# EAGLE board untitled (EAGLE 9.6.2)
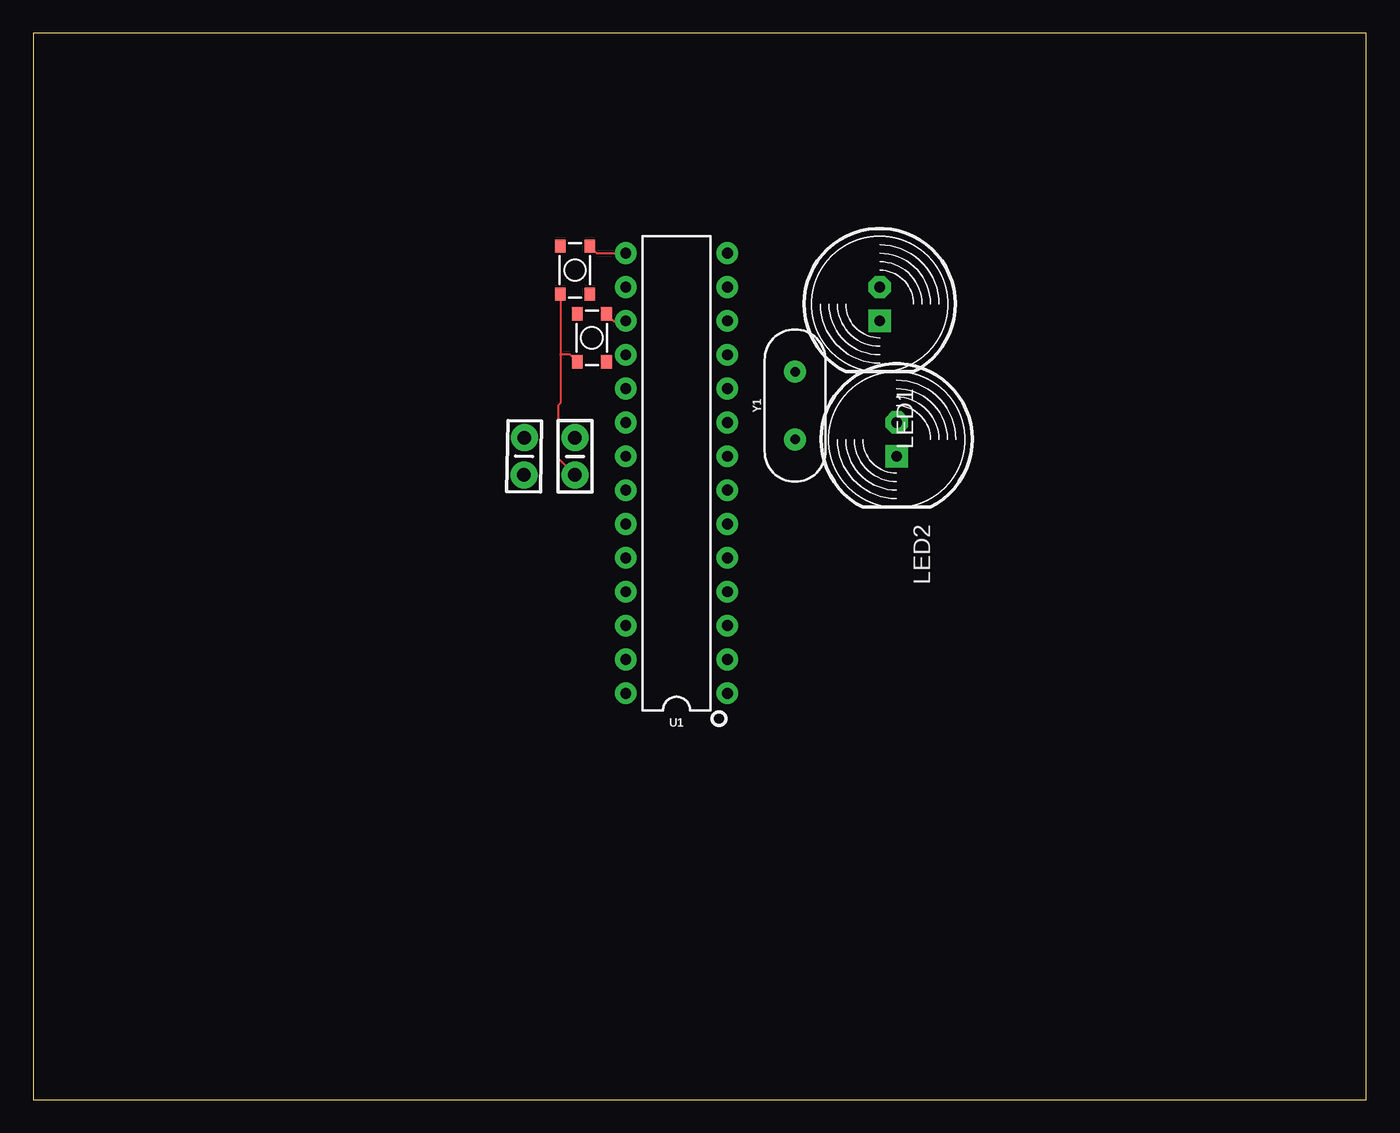
[diagram p0: board, top side]
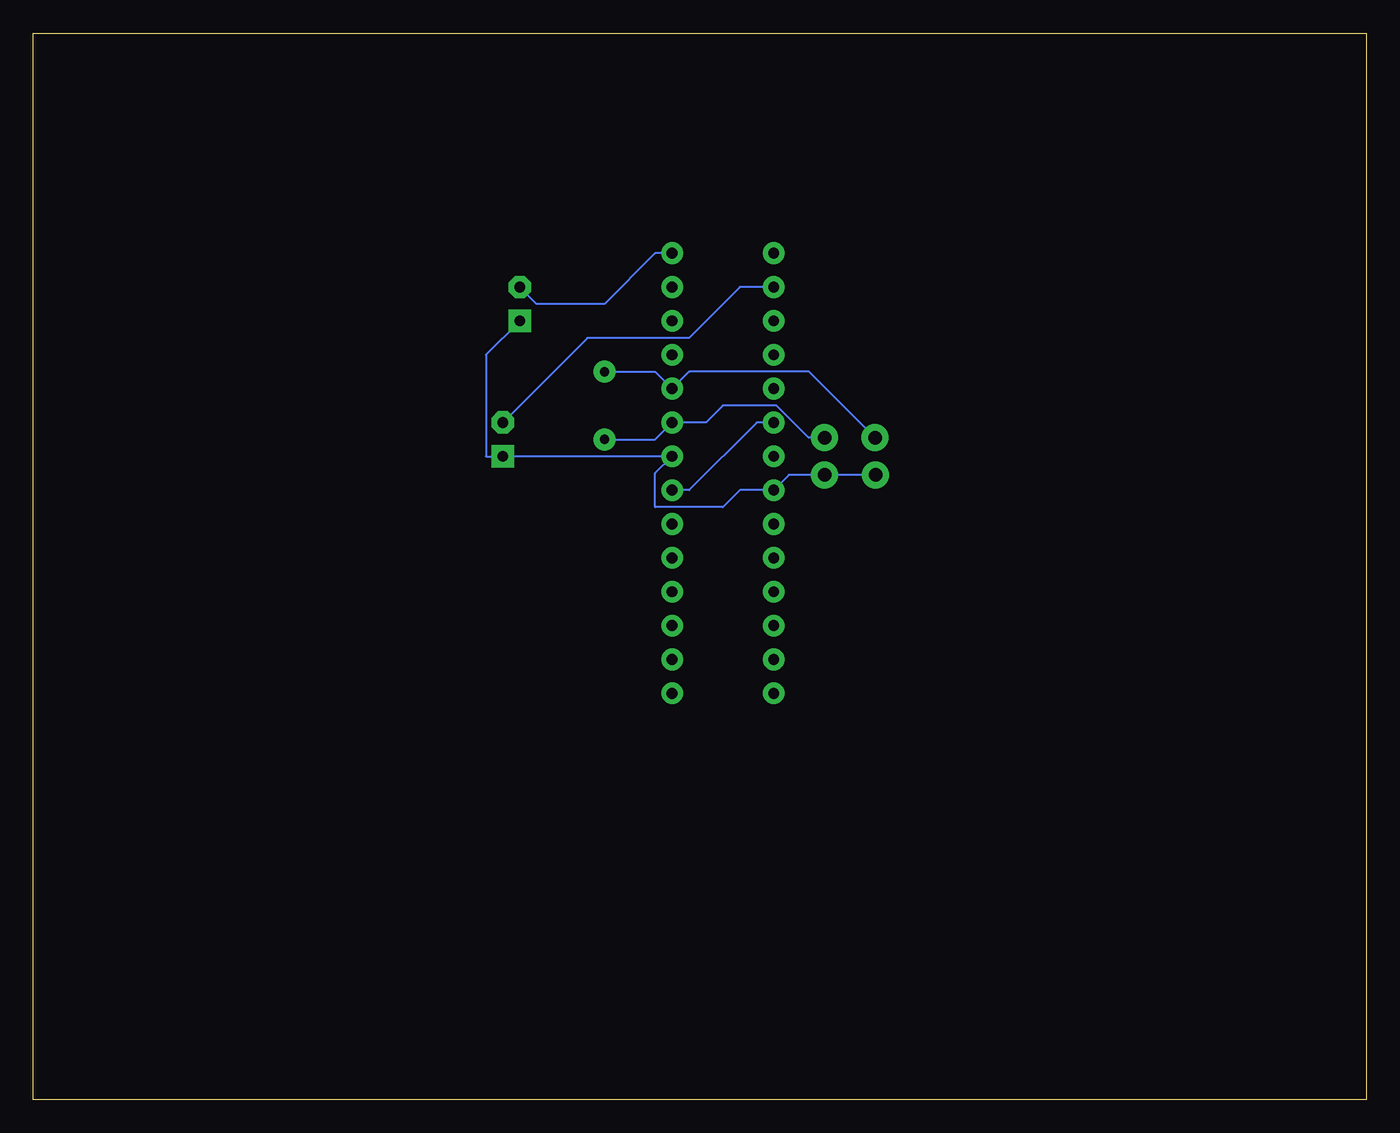
[diagram p1: board, bottom side, seen from below]

Size 100 x 80 mm. Coordinates in mm from the lower left corner, seen from the top.
Outline: 0,0 100,0 100,80 0,80 0,0
Copper layers (1*16): Top 0.035mm / dielectric 1.5mm / Bottom 0.035mm
Design rules "default": minimum track width 6mil, minimum drill 0.35mm, track to track 6mil, track to pad 6mil, pad to pad 6mil, via to via 6mil, smd to smd 6mil, copper to edge 40mil, drill to drill 6mil, minimum pad ring 10mil, minimum via ring 8mil, stop-mask expansion 4mil, vias tented up to drill 0mil, thermal gap 10mil

## Footprints (pad centres in the part's own frame; a part is rotated, then mirrored left to right if it is on the bottom)
CAP-PTH-SMALL-KIT = drill 1.016 pad 2.032: 1 -1.397,0; 2 1.397,0
LED10MM = drill 0.813 pad 1.676 octagon: A -1.27,0 | drill 0.813 pad 1.676 square: K 1.27,0
TACTILE_SWITCH_SMD-3 = smd 1 x 0.8: 1 -1.8,1.1; 2 1.8,1.1; 3 -1.8,-1.1; 4 1.8,-1.1
DIP28 = drill 0.813 pad 1.626: 1 -16.51,-3.81; 2 -13.97,-3.81; 3 -11.43,-3.81; 4 -8.89,-3.81; 5 -6.35,-3.81; 6 -3.81,-3.81; 7 -1.27,-3.81; 8 1.27,-3.81; 9 3.81,-3.81; 10 6.35,-3.81; 11 8.89,-3.81; 12 11.43,-3.81; 13 13.97,-3.81; 14 16.51,-3.81; 15 16.51,3.81; 16 13.97,3.81; 17 11.43,3.81; 18 8.89,3.81; 19 6.35,3.81; 20 3.81,3.81; 21 1.27,3.81; 22 -1.27,3.81; 23 -3.81,3.81; 24 -6.35,3.81; 25 -8.89,3.81; 26 -11.43,3.81; 27 -13.97,3.81; 28 -16.51,3.81
HC49US = drill 0.7 pad 1.651: 1 -2.54,0; 2 2.54,0

## Placement (x,y rotation side)
C1  0.1uF  [CAP-PTH-SMALL-KIT]  40.64,48.26 270 top
C2  0.1uF  [CAP-PTH-SMALL-KIT]  36.83,48.26 269.1 top
LED1  [LED10MM]  63.5,59.69 270 top
LED2  [LED10MM]  64.77,49.53 270 top
LED_SW  SWITCH-MOMENTARY-SPSTSMD-3  [TACTILE_SWITCH_SMD-3]  40.64,62.23 270 top
LED_SW1  SWITCH-MOMENTARY-SPSTSMD-3  [TACTILE_SWITCH_SMD-3]  41.91,57.15 270 top
U1  328P  [DIP28]  48.26,46.99 90 top
Y1  [HC49US]  57.15,52.07 90 top

## Library data of the parts
C1 C2 = SparkFun-Capacitors; PROD_ID: CAP-08370
LED1 LED2 = led
LED_SW LED_SW1 = SparkFun-Retired
U1 = SparkFun-IC-Microcontroller; PROD_ID: IC-09136
Y1 = SparkFun-Clocks

## Nets
3.3V: C1.2 C2.2 LED1.K LED2.K LED_SW1.4 LED_SW.4 U1.8 U1.22
N$1: LED_SW.1 U1.15
N$2: LED1.A U1.14
N$3: LED2.A U1.16
N$4: LED_SW1.1 U1.17
VCC: U1.7 U1.20
XTAL1: C1.1 U1.9 Y1.1
XTAL2: C2.1 U1.10 Y1.2

## Tracks (layer width: path | path; a pad name or v marks a point on that pad's centre or on a via)
3.3V
  Top 0.152: C1.2 39.37,48.13 39.37,52.07 39.54,52.24 39.54,55.88 | LED_SW.4 39.54,55.88 | LED_SW1.4 40.28,55.88 39.54,55.88
  Bottom 0.152: C2.2 C1.2 | C1.2 | C1.2 43.31,46.86 U1.22 46.99,45.72 48.26,44.45 53.34,44.45 53.34,46.99 U1.8 LED2.K 66.04,48.26 66.04,55.88 LED1.K
N$1
  Top 0.152: LED_SW.1 42.27,63.5 U1.15
N$2
  Bottom 0.152: U1.14 53.34,63.5 57.15,59.69 62.23,59.69 LED1.A
N$3
  Bottom 0.152: U1.16 46.99,60.96 50.8,57.15 58.42,57.15 LED2.A
N$4
  Top 0.152: LED_SW1.1 43.54,58.42 U1.17
VCC
  Bottom 0.152: U1.20 45.72,50.8 50.8,45.72 U1.7
XTAL1
  Bottom 0.152: Y1.1 53.34,49.53 U1.9 49.53,50.8 48.26,52.07 44.25,52.07 41.83,49.66 C1.1
XTAL2
  Bottom 0.152: Y1.2 53.34,54.61 U1.10 50.8,54.61 41.8,54.61 C2.1